# Altium PCB AMPv0.PcbDoc
Units mil, origin at the board's own origin, x right, y up, seen from the top; angles counter-clockwise.
Board outline 6000 x 4000 mil, 2 copper layers (Top Layer, Bottom Layer); 56 components, 42 nets, 175 pads, 16 vias.
Unrouted connection lines stored in the file: 121.
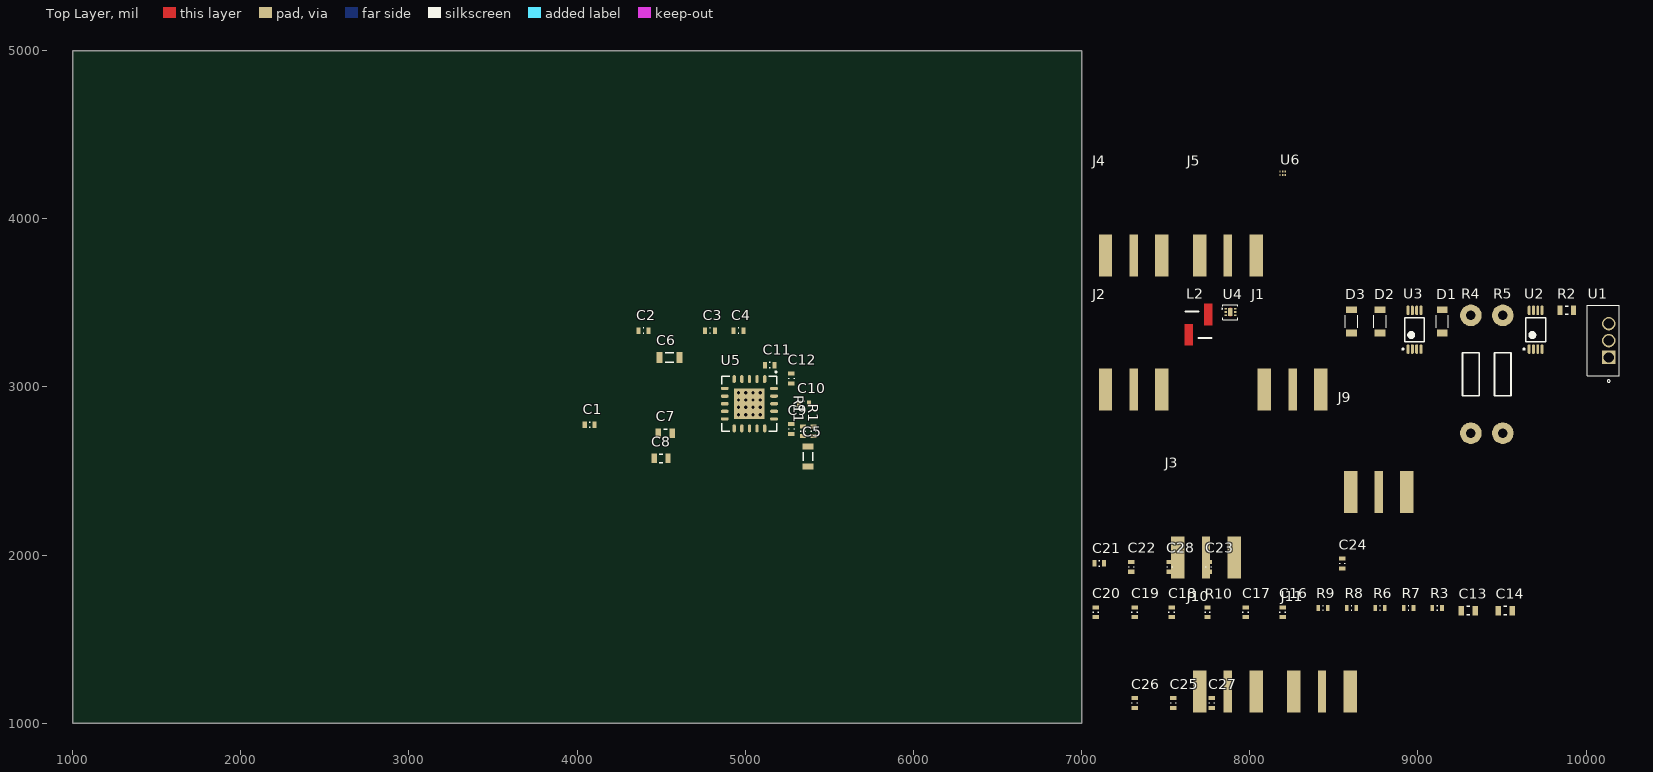
[diagram p0: Top Layer view]
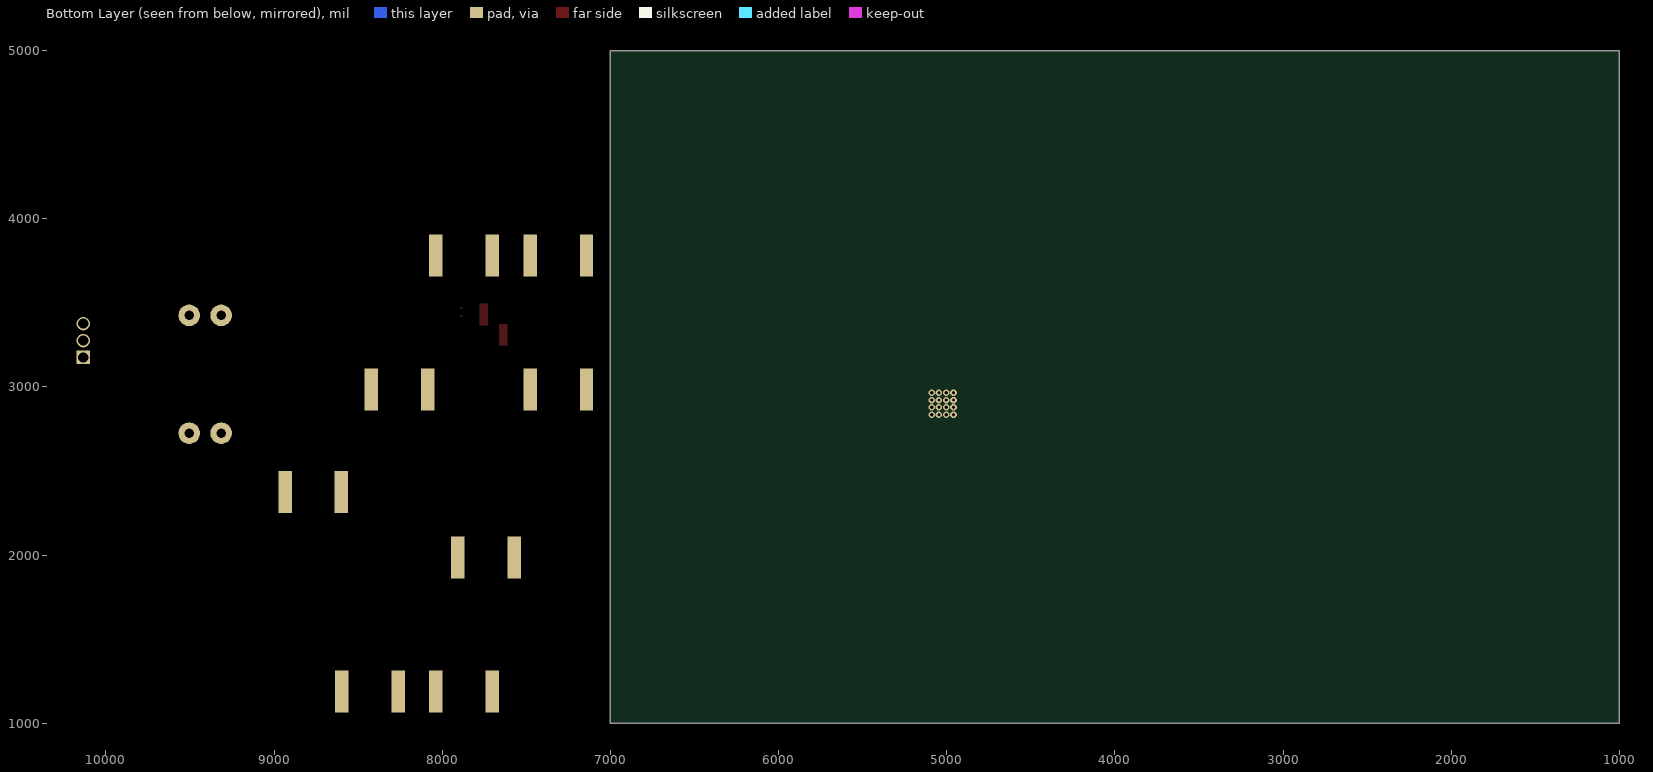
[diagram p1: Bottom Layer view, seen from below]

## Layer stack, top to bottom
Top Solder: solder mask 0.4, Solder Resist, Dk 3.5
Top Layer: signal copper 1.4
Dielectric 1: dielectric 12.6, FR-4, Dk 4.8
Bottom Layer: signal copper 1.4
Bottom Solder: solder mask 0.4, Solder Resist, Dk 3.5

## Board outline
1000,1000 7000,1000 7000,5000 1000,5000

## Design rules (kind name [scope] priority, off if disabled: settings)
Clearance [All] p1: gap=5 ignorepadtopadclearanceinfootprint=FALSE
PolygonConnect [All] p1: connectstyle=Relief reliefconductorwidth=10 reliefentries=4 polygonreliefangle="90 Angle" airgapwidth=10
RoomDefinition LNA [InComponentClass('LNA')] p1: confinementstyle=ConfineIn formatcopy=TRUE lockcomponents=FALSE outline 7045,1870 7910,1870 7910,2090 7045,2090
RoomDefinition HPA_Gate_Control [InComponentClass('HPA_Gate_Control')] p2: confinementstyle=ConfineIn formatcopy=TRUE lockcomponents=FALSE outline 7045,1600 9630,1600 9630,1820 7045,1820
RoomDefinition HPA [InComponentClass('HPA')] p3: confinementstyle=ConfineIn formatcopy=TRUE lockcomponents=FALSE outline 7045,1330 9610,1330 9610,1550 7045,1550
RoomDefinition Duplexer [InComponentClass('Duplexer')] p4: confinementstyle=ConfineIn formatcopy=TRUE lockcomponents=FALSE outline 7045,1060 7930,1060 7930,1280 7045,1280
RoutingVias [All] p1: holewidth=28 width=50 viastyle="Through Hole" minholewidth=28 minwidth=50 maxholewidth=28 maxwidth=50
SolderMaskExpansion [All] p1: expansion=4 istentingtop=FALSE
Width [All] p1: maxlimit=10 minlimit=10 preferedwidth=10
30 further rules are at their usual default settings.

## Classes and differential pairs
component class LNA: C21 C22 C23 C28 J4 J5 J7 U6
component class HPA: C1 C2 C3 C4 C5 C6 C7 C8 C9 C10 C11 C12 J3 R1 R11 U5
component class HPA_Gate_Control: C13 C14 C15 C16 C17 C18 C19 C20 D1 D2 D3 J1 J2 L2 R2 R3 R4 R5 R6 R7 R8 R9 R10 U1 U2 U3 U4
component class Duplexer: C24 C25 C26 C27 D4 J8 J9 J10 J11 L3 U7 U8

## Components (designator, comment, footprint, x,y, rotation, side; value= is the part's Value field where it differs from the comment)
C1 "15nF" C_0603 4075,2775 r0 top
C2 "100nF" C_0603 4395,3335 r0 top
C3 "3pF" C_0603 4790,3335 r0 top
C4 "100nF" C_0603 4960,3335 r0 top
C5 "10uF" C_1206 5374.02,2586.61 r270 top
C6 "10uF" C_1206 4550,3175 r0 top
C7 "4.7uF" C_0805 4525,2725 r0 top
C8 "4.7uF" C_0805 4500,2575 r0 top
C9 "0.1pF" C_0603 5275,2750 r90 top
C10 "1.5pF" C_0603 5350,2900 r180 top
C11 "3pF" C_0603 5145.67,3129.92 r0 top
C12 "0.1pF" C_0603 5275,3050 r90 top
C13 "C_0805" C_0805 9300,1670 r0 top value=100nF
C14 "C_0805" C_0805 9520,1670 r0 top value=100nF
C16 "C_0603" C_0603 8195,1660 r90 top value=100pF
C17 "C_0603" C_0603 7975,1660 r90 top value=100pF
C18 "C_0603" C_0603 7535,1660 r90 top value=100pF
C19 "C_0603" C_0603 7315,1660 r90 top value=100pF
C20 "C_0603" C_0603 7085,1660 r90 top value=100pF
C21 "C_0603" C_0603 7105,1950 r0 top value=100pF
C22 "C_0603" C_0603 7295,1930 r90 top value=100pF
C23 "C_0603" C_0603 7755,1930 r90 top value=100pF
C24 "C_0603" C_0603 8550,1950 r90 top value=100pF
C25 "C_0603" C_0603 7545,1120 r90 top value=100pF
C26 "C_0603" C_0603 7315,1120 r90 top value=100pF
C27 "C_0603" C_0603 7775,1120 r90 top value=100pF
C28 "C_0603" C_0603 7525,1930 r90 top value=100pF
D1 "LL4448-GS08" MELF_SOD-80_VIS 9145,3390 r90 top
D2 "LL4448-GS08" MELF_SOD-80_VIS 8775,3390 r90 top
D3 "LL4448-GS08" MELF_SOD-80_VIS 8605,3390 r90 top
J1 "SMA_edgelaunch" SMA_edgelaunch 8255,3110 r0 top
J2 "SMA_edgelaunch" SMA_edgelaunch 7310,3110 r0 top
J3 "SMA_edgelaunch" SMA_edgelaunch 7740,2110 r0 top
J4 "SMA_edgelaunch" SMA_edgelaunch 7310,3905 r0 top
J5 "SMA_edgelaunch" SMA_edgelaunch 7870,3905 r0 top
J9 "SMA_edgelaunch" SMA_edgelaunch 8767.5,2500 r0 top
J10 "SMA_edgelaunch" SMA_edgelaunch 7870,1315 r0 top
J11 "SMA_edgelaunch" SMA_edgelaunch 8430,1315 r0 top
L2 "SMAC20-3J-RC" SMAC20 7695,3370 r0 top value=8nH
R1 "5.1" R_0603 5405.51,2736.22 r270 top
R2 "ERJ6CWFR010V" R_0805 9885,3455 r0 top value=0.01
R3 "R_0603" R_0603 9115,1685 r0 top value=100k
R4 "R_TH_AX_small" R_TH_AX 9315,3075 r90 top value=10k
R5 "R_TH_AX_small" R_TH_AX 9505,3075 r90 top value=10k
R6 "R_0603" R_0603 8775,1685 r0 top value=100k
R7 "R_0603" R_0603 8945,1685 r0 top value=100k
R8 "R_0603" R_0603 8605,1685 r0 top value=100k
R9 "R_0603" R_0603 8435,1685 r0 top value=100k
R10 "R_0603" R_0603 7750,1660 r90 top value=100k
R11 "5.1" R_0603 5342.52,2736.22 r270 top
U1 "LD1084V" TO-220FP_STM 10135,3175 r90 top
U2 "LTC6103CMS8#PBF" TSOP65P640X120-8N 9700,3340 r90 top
U3 "LM2904FVT-E2" TSOP65P640X120-8N 8980,3340 r90 top
U4 "SKY13348-374LF" SON7_1p5sq_SKY 7885,3445 r0 top
U5 "B10G3438N55D" QFN115P800X800X220_HS-21N 5025,2900 r270 top
U6 "SKY65806-636LF" SKY65806-636LF 8180,4260 r0 top

## Footprints (in the part's own frame and the unit in brackets; to place one, negate y for a bottom-side part, rotate by r counter-clockwise, add the part's x,y. Pads: shape width x height; smd on the part's side, far side on the other; paste and mask are expansions set on the pad)
C_0603 [mm] "Chip Capacitor, 2-Leads, Body 1.55x0.85mm, IPC Medium Density"
  rect 0.62x0.98 smd: 1(-0.74,0) 2(0.74,0)
  silkscreen extent -0.05,-0.39 0.05,0.39, body extent -0.8,-0.45 0.8,0.45, height 0.6
C_0805 [mm] "Chip Capacitor, 2-Leads, Body 2.00x1.30mm, IPC Medium Density"
  rect 0.8x1.45 smd: 1(-1.05,0) 2(1.05,0)
  silkscreen extent -0.25,-0.63 0.25,0.63, body extent -1.05,-0.7 1.05,0.7, height 0.6
C_1206 [mm] "Chip Capacitor, 2-Leads, Body 3.00x1.50mm, IPC Medium Density"
  rect 0.9x1.65 smd: 1(-1.5,0) 2(1.5,0)
  silkscreen extent -0.65,-0.72 0.65,0.72, body extent -1.55,-0.8 1.55,0.8, height 1.2
MELF_SOD-80_VIS [mil]
  rect 39x65 smd paste+0 mask+0: 1(-69.5,0) 2(69.5,0)
  silkscreen extent -38,-36 38,36, body extent -73,-31 73,31, height 63
QFN115P800X800X220_HS-21N [mm] "QFN, 20-Leads, Body 8.00x8.00mm, Pitch 1.15mm, Thermal Pad 4.63x4.62mm, IPC Medium Density"
  oval 1.2x0.5 smd: 1(-3.725,2.3) 2(-3.725,1.15) 3(-3.725,0) 4(-3.725,-1.15) 5(-3.725,-2.3) 11(3.725,-2.3) 12(3.725,-1.15) 13(3.725,0) 14(3.725,1.15) 15(3.725,2.3)
  oval 0.5x1.2 smd: 6(-2.3,-3.725) 7(-1.15,-3.725) 8(0,-3.725) 9(1.15,-3.725) 10(2.3,-3.725) 16(2.3,3.725) 17(1.15,3.725) 18(0,3.725) 19(-1.15,3.725) 20(-2.3,3.725)
  rect 4.63x4.62 smd: 21(0,0)
  silkscreen extent -4.92,-4.15 4.15,4.15, body extent -4.01,-4.01 4.01,4.01, height 2.2
R_0603 [mm] "Chip Resistor, 2-Leads, Body 1.55x0.85mm, IPC Medium Density"
  rect 0.55x0.9 smd: 1(-0.725,0) 2(0.725,0)
  silkscreen extent -0.05,-0.35 0.05,0.35, body extent -0.8,-0.45 0.8,0.45, height 0.6
R_0805 [mm] "Chip Resistor, 2-Leads, Body 2.00x1.30mm, IPC Medium Density"
  rect 0.75x1.4 smd: 1(-1.025,0) 2(1.025,0)
  silkscreen extent -0.25,-0.6 0.25,0.6, body extent -1.05,-0.7 1.05,0.7, height 0.6
R_TH_AX [mm] "PR01 Vishay Through-hole resistor"
  round 3.25 hole 1.45: 1(-8.9,0) 2(8.9,0)
  silkscreen extent -3.25,-1.25 3.25,1.25
SKY65806-636LF [mm]
  rect 0.2x0.3 smd: 1(0,0) 2(0.4,0) 3(0.8,0) 4(0.8,0.5) 5(0.4,0.5) 6(0,0.5)
  body extent -0.15,-0.1 0.95,0.6, height 0.55
SMA_edgelaunch [mil]
  rect 50x250 smd: 1(0,-125)
  rect 80x250 smd: 2(-167.5,-125) 2(167.5,-125)
  rect 80x250 smd far side: 2(-167.5,-125) 2(167.5,-125)
SMAC20 [mil] "5% SMD Air Core Inductor"
  Top Layer region: 82.48,-5.02 82.48,124.9 32.48,124.9 32.48,-5.02
  Top Layer region: -32.48,-124.9 -32.48,5.02 -82.48,5.02 -82.48,-124.9
  silkscreen extent -79,-79 79,79
SON7_1p5sq_SKY [mil]
  rect 14x10 smd paste-5 mask+0: 1(-28.54,19.68) 2(-28.54,0) 3(-28.54,-19.68) 4(28.54,-19.68) 5(28.54,0) 6(28.54,19.68)
  rect 28x47 smd paste-14: 7(0,0)
  Top Layer region: 4,20 -4,20 -4,25.5 4,25.5
  Top Layer region: 4,-20 -4,-20 -4,-25.5 4,-25.5
  silkscreen extent -52,-44 44,44, body extent 0,0 10,10, height 10
TO-220FP_STM [mil]
  rect 80x80 hole 60: 1(0,0)
  round 80 hole 60: 2(100.39,0) 3(200.79,0)
  silkscreen extent -148,-64 310,128, body extent -105,-59 305,123, height 646
TSOP65P640X120-8N [mm] "TSOP, 8-Leads, Body 3.00x4.40mm, Pitch 0.65mm, IPC Medium Density"
  oval 1.45x0.45 smd: 1(-2.925,0.975) 2(-2.925,0.325) 3(-2.925,-0.325) 4(-2.925,-0.975) 5(2.925,-0.975) 6(2.925,-0.325) 7(2.925,0.325) 8(2.925,0.975)
  silkscreen extent -3.05,-1.5 1.8,1.87, body extent -3.2,-1.5 3.2,1.5, height 1.2

## Part data
C1 C2 C4: library part C_0603, "TDK 0603 CAP CER CGA5 X7R"
C3 C9 C10 C11 C12: library part C_0402, "TDK 0402 CAP CER CGA X7R"
C5 C6: library part C_1210, "TDK 1210 CAP CER CGA6 X7R"
C7 C8: library part C_0805, "TDK 0805 CAP CER CGA4 X7R"
C13 C14: "TDK 0805 CAP CER CGA4 X7R"
C16 C17 C18 C19 C20 C21 C22 C23 C24 C25 C26 C27 C28: "TDK 0603 CAP CER CGA5 X7R"
D1 D2 D3: "Diode Standard 100 V 150mA Surface Mount SOD-80 MiniMELF", Mfr_Name=Vishay, Copyright="Copyright (C) 2022 Ultra Librarian. All rights reserved.", Digi-Key_Part_Number_1=LL4448-GS08CT-ND, Digi-Key_Part_Number_2=LL4448-GS08DKR-ND, Digi-Key_Part_Number_3=LL4448-GS08TR-ND, Manufacturer_Part_Number=LL4448-GS08, RefDes=RefDes, Type=DEV
J1 J2 J3 J4 J5 J9 J10 J11: "Generic 50 ohm SMA edge launch connector"
L2: library part L_SMAC20, "8nH 4A 5GHz 5% SMD Air Core Inductor"
R1 R11: library part R_0603, "Yageo RC0603FR-07 1% 0603", ComponentLink1Description="Digikey search", ComponentLink1URL=https://www.digikey.com/en/products/filter/chip-resistor-surface-mount/52?s=N4IgjCBcoExaBjKAzAhgGwM4FMA0IB7KAbXAAYAOAdgE4QBdfABwBcoQBlFgJwEsA7AOYgAvvgDM8EEkhoseQiXBhxERiFbsufIaPxgYNCNGkoMOfEUilxNcTAoNmbSJx4DhY8DQp0TMuQtFaxAyJw0XNx1PfABaOH8oHgBXBStSAFYGL1jjRDN5SyUVbLisxNlzNKU4ehyAFikAqqKQigN6xzqvBNJKMgyAAm5sTF5MFgJucIA2KV4AE3ZcsghndhB8AEcWAE92NZA9pmx2VEwkEREgA
R2: library part R_ERJ6CWFR010V, "RES 0.01 OHM 1% 1/2W 0805", Package=None, Supplier Part Number 1=P19196CT-ND, Availability=Unavailable, MP=ERJ6CWFR010V, Price=None, Supplier 1=Digi-Key
R3 R6 R7 R8 R9 R10: "Yageo RC0603FR-07 1% 0603", ComponentLink1Description="Digikey search", ComponentLink1URL=https://www.digikey.com/en/products/filter/chip-resistor-surface-mount/52?s=N4IgjCBcoExaBjKAzAhgGwM4FMA0IB7KAbXAAYAOAdgE4QBdfABwBcoQBlFgJwEsA7AOYgAvvgDM8EEkhoseQiXBhxERiFbsufIaPxgYNCNGkoMOfEUilxNcTAoNmbSJx4DhY8DQp0TMuQtFaxAyJw0XNx1PfABaOH8oHgBXBStSAFYGL1jjRDN5SyUVbLisxNlzNKU4ehyAFikAqqKQigN6xzqvBNJKMgyAAm5sTF5MFgJucIA2KV4AE3ZcsghndhB8AEcWAE92NZA9pmx2VEwkEREgA
R4 R5: "Vishay 5% axial through-hole resistor PR0100 r500", ComponentLink1Description="Digikey search", ComponentLink1URL=https://www.digikey.com/en/products/filter/through-hole-resistors/53?s=N4IgjCBcoKxaBjKAzAhgGwM4FMA0IB7KAbRAGYwA2ATgCYIBdfABwBcoQBlVgJwEsAdgHMQAX3xha1CNBBJIaLHkIlyYAOxhqABhBMQbDt37CxE6gA5q8OSgw58RSKV37DkLr0EjxIALS0NvK8AK7KTqRwDL5%2BACxBdkqOqmAWFtpRMXCy8ooOKs4ggdG%2BlDZ8ACYcfmDaECzsHiD4AI6sAJ4c9SAdzNgcqJhIoqJAA
U1: "Linear Voltage Regulator IC Positive Adjustable 1 Output 5A TO-220", Mfr_Name=STMicroelectronics, Copyright="Copyright (C) 2022 Ultra Librarian. All rights reserved.", Digi-Key_Part_Number_1=497-3413-5-ND, Manufacturer_Part_Number=LD1084V, RefDes=RefDes, Type=DEV
U2: "IC CURRENT SENSE 2 CIRCUIT 8MSOP"
U3: "General Purpose Amplifier 2 Circuit Push-Pull 8-TSSOP-B"
U4: "RF Switch IC SPDT 6 GHz 50Ohm 37dBm 6-MLPD (1.5x1.5)", Mfr_Name=Skyworks, Supplier Part Number 1=863-1335-1-ND, Copyright="Copyright (C) 2022 Ultra Librarian. All rights reserved.", Digi-Key_Part_Number_1=863-1335-1-ND, Digi-Key_Part_Number_2=863-1335-2-ND, Digi-Key_Part_Number_3=863-1335-6-ND, Manufacturer_Part_Number=SKY13348-374LF, RefDes=RefDes, Supplier 1=Digi-Key, Type=DEV
U5: "RF Mosfet LDMOS 28 V 75 mA 3.4GHz ~ 3.8GHz 34.2dB 47.5dBm"
U6: "IC RF AMP LNA 3.4GHZ-3.8GHZ"

## Via types
v1: diameter 39.37, hole 19.68, Top Layer to Bottom Layer, 16 vias

## Nets (pads, with @x,y where several pads share a name; then routed paths per layer and width w, separated by ;. In a path a pad name is that pad's centre, name@x,y a point inside that pad or via, vN(x,y) a via of type N, cw(c..) or ccw(c..) an arc to the next point about the centre after c; other vN are vias at no path point)
+3V3: C26.1
+5V0: C27.2
+30V0: C14.2 C16.1 R2.1 R3.1 R5.1 R8.1 R9.1 U1.2 U3.8
GND: C1.2 C2.2 C3.1 C4.2 C6.1 C7.1 C8.1 C9.2 C11.1 C12.1 C13.1 C14.1 C16.2 C20.2 C23.2 C26.2 C27.1 C28.2 D1.1 D3.1 J1.2 J2.2 J3.2 J4.2 J5.2 J9.2 J10.2 J11.2 R1.1 R4.1 R6.2 R7.2 R11.1 U3.4 U4.5 U4.7 U5.7 U5.9 U5.21
  other v1: 4960.04,2835.04 5003.35,2835.04 5046.65,2835.04 5089.96,2835.04 4960.04,2878.35 5003.35,2878.35 5046.65,2878.35 5089.96,2878.35 4960.04,2921.65 5003.35,2921.65 5046.65,2921.65 5089.96,2921.65 4960.04,2964.96 5003.35,2964.96 5046.65,2964.96 5089.96,2964.96
Id_sense: R7.1 U2.2
Idq_sense: R6.1 R10.1 U2.1
NetC5_1: C5.1 R1.2 R11.2
NetC7_2: C7.2 U5.11
NetC8_2: C8.2 U5.12
NetC9_1: C9.1 C10.1 C12.2 U5.16 U5.17 U5.18 U5.19 U5.20
NetC10_2: C10.2 J3.1
NetC17_1: C17.1 U5.8
NetC17_2: C17.2 U4.6
NetC18_1: C18.1 J1.1
NetC18_2: C18.2 U4.4
NetC19_1: C19.1 U4.2
NetC19_2: C19.2 J2.1
NetC21_1: C21.1 U6.6
NetC21_2: C21.2 J4.1
NetC22_1: C22.1 J5.1
NetC22_2: C22.2 U6.3
NetC24_1: C24.1 J9.1
NetC24_2: C24.2
NetC25_1: C25.1
NetC25_2: C25.2 J11.1
NetD1_2: D1.2 U2.4
NetD2_1: D2.1 R10.2 U3.3
NetD2_2: D2.2 U3.1
NetD3_2: D3.2 R9.2 U3.2
NetD4_1: 
NetD4_2: J10.1
NetJ7_2: U6.1
NetJ7_3: U6.4
NetR3_2: R3.2 U2.5
NetR4_2: R4.2 R5.2 U1.1
NetR8_2: R8.2 U2.8
NetU7_4: 
TX_EN: 
VDD: R2.2 U2.6 U2.7
VDD_HPA: C1.1 C2.1 C3.2 C4.1 C5.2 C6.2 C11.2 U5.1 U5.6 U5.15
VDD_LNA: C23.1 C28.1 U6.2
VIN: C13.2 C20.1 U1.3
pads on no net: U2.3 U3.5 U3.6 U3.7 U4.1 U4.3 U5.2 U5.3 U5.4 U5.5 U5.10 U5.13 U5.14 U6.5

## Text inside footprints (layer, text, board x,y; h text height)
J1: Mechanical 1 "board edge" at 8111,3151 h30
J2: Mechanical 1 "board edge" at 7166,3151 h30
J3: Mechanical 1 "board edge" at 7596,2151 h30
J4: Mechanical 1 "board edge" at 7166,3946 h30
J5: Mechanical 1 "board edge" at 7726,3946 h30
J9: Mechanical 1 "board edge" at 8623.5,2541 h30
J10: Mechanical 1 "board edge" at 7726,1356 h30
J11: Mechanical 1 "board edge" at 8286,1356 h30